# Altium PCB Bemine-mc60_PCB.PcbDoc
Units mm, origin at the board's own origin, x right, y up, seen from the top; angles counter-clockwise.
Board outline 74.65 x 35.15 mm, 2 copper layers (Top Layer, Bottom Layer); 88 components, 55 nets, 297 pads, 32 vias.
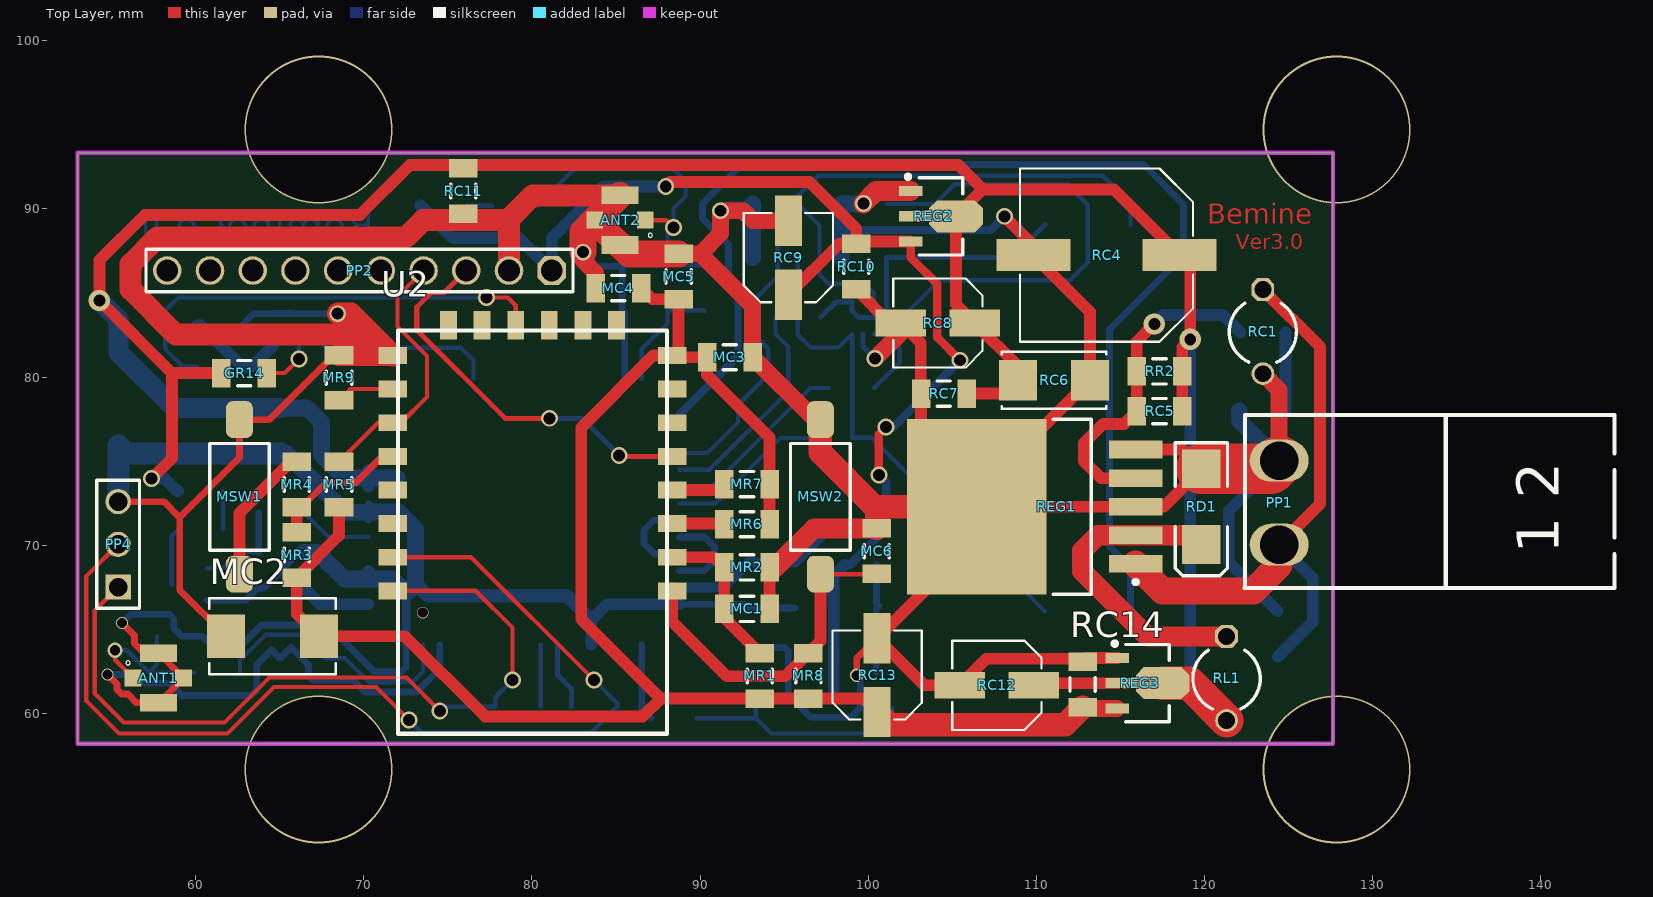
[diagram p0: Top Layer view]
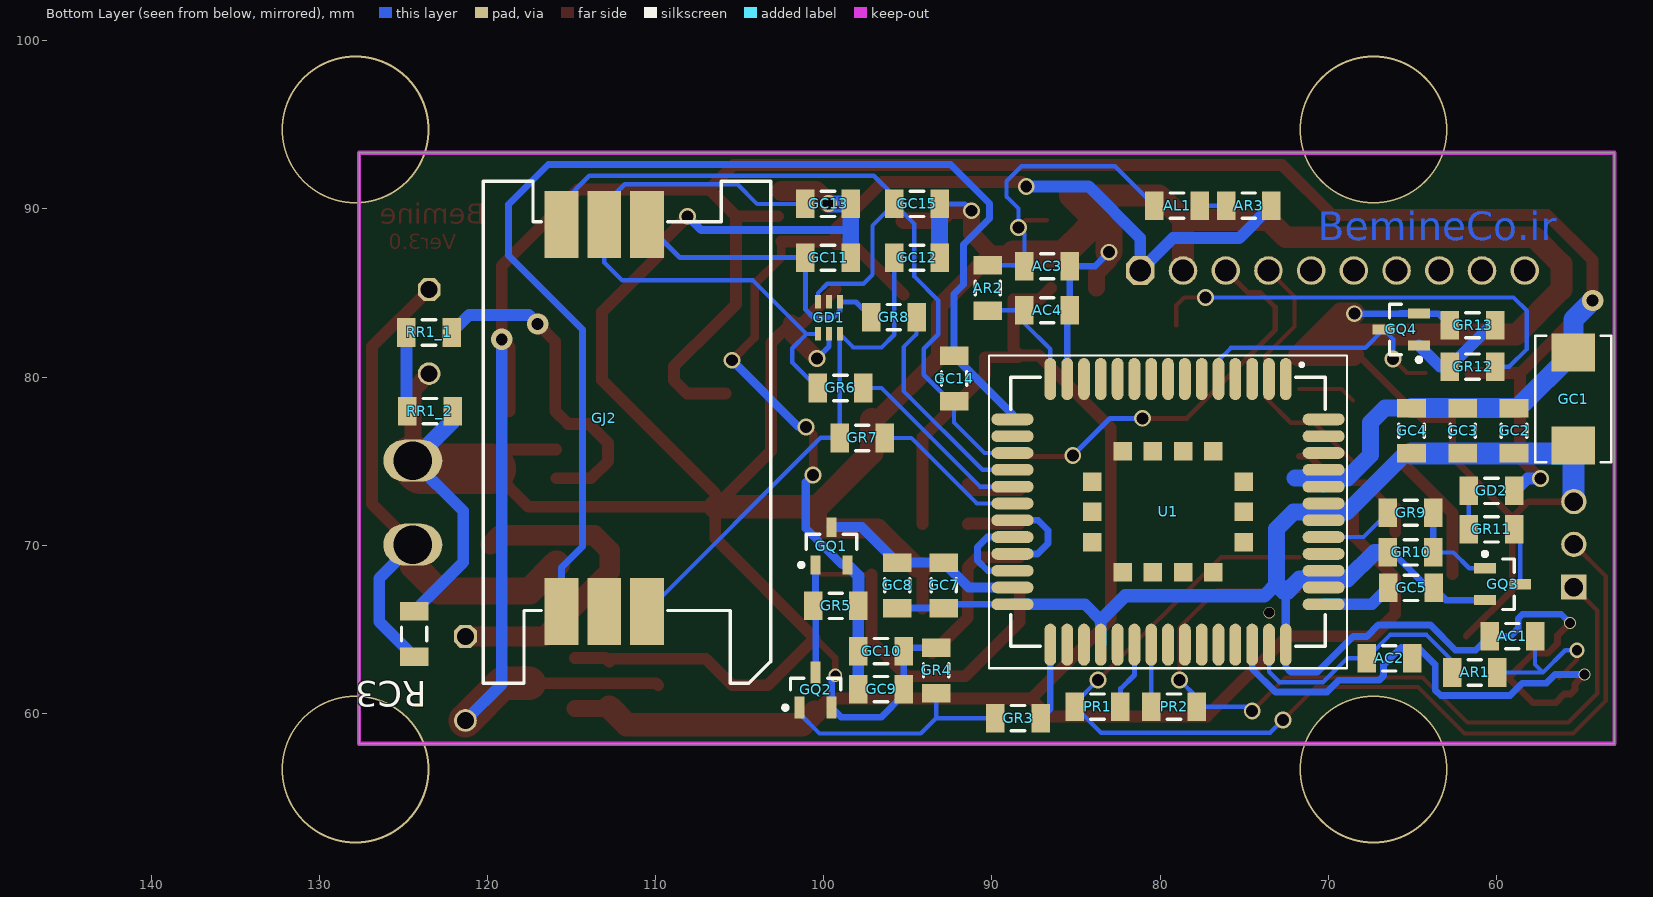
[diagram p1: Bottom Layer view, seen from below]

## Layer stack, top to bottom
Top Solder: solder mask 0.0102, Solder Resist, Dk 3.5
Top Layer: signal copper 0.0356
Dielectric 1: dielectric 0.32, FR-4, Dk 4.8
Bottom Layer: signal copper 0.0356
Bottom Solder: solder mask 0.0102, Solder Resist, Dk 3.5

## Board outline
52.984,58.191 52.984,93.345 127.635,93.345 127.635,58.191

## Design rules (kind name [scope] priority, off if disabled: settings)
Clearance [All] p1: gap=0.254 ignorepadtopadclearanceinfootprint=FALSE except(0: Arc-Hole Track-Hole SMDPad-Hole THPad-Hole Via-Hole Fill-Hole Poly-Hole Region-Hole Text-Hole)
PolygonConnect [All] p1: connectstyle=Relief reliefconductorwidth=0.254 reliefentries=4 polygonreliefangle="90 Angle" airgapwidth=0.254
RoutingTopology [InNet('GND')] p1: topology=Daisy_Balanced
RoutingVias [All] p1: holewidth=0.711 width=1.27 viastyle="Through Hole" minholewidth=0.711 minwidth=1.27 maxholewidth=0.711 maxwidth=1.27
SolderMaskExpansion [All] p1: expansion=0.102
Width [All] p1: maxlimit=4 minlimit=0.254 preferedwidth=0.7
29 further rules are at their usual default settings.

## Components (designator, comment, footprint, x,y, rotation, side; value= is the part's Value field where it differs from the comment)
AC1 "NM" C1206 59.055,64.592 r0 bottom
AC2 "NM" C1206 66.37,63.271 r180 bottom
AC3 "NM" C1206 86.716,86.589 r180 bottom
AC4 "NM" C1206 86.716,83.972 r180 bottom
AL1 "47nH" C1206 78.994,90.195 r180 bottom value=10mH
ANT1 "" MOLEX_73412-0110 57.785,62.103 r0 top
ANT2 "73412-0110" MOLEX_73412-0110 85.242,89.332 r180 top
AR1 "0" C1206 61.29,62.433 r180 bottom
AR2 "0" C1206 90.246,85.293 r90 bottom
AR3 "10" C1206 74.727,90.195 r0 bottom
GC1 "100uF; 16V" CAPCP7343X430N 55.423,78.689 r270 bottom
GC2 "100nF" C1206 58.953,76.81 r270 bottom
GC3 "33pF" C1206 62.001,76.81 r270 bottom
GC4 "10pF" C1206 65.049,76.81 r270 bottom
GC5 "2.2uF" C1206 65.075,67.462 r180 bottom
GC7 "10uF" C1206 92.862,67.615 r270 bottom
GC8 "100nF" C1206 95.631,67.615 r270 bottom
GC9 "10uF" C1206 96.596,61.443 r180 bottom
GC10 "100nF" C1206 96.596,63.703 r180 bottom
GC11 "33pF" C1206 99.746,87.097 r0 bottom
GC12 "33pF" C1206 94.463,87.097 r0 bottom
GC13 "33pF" C1206 99.746,90.297 r0 bottom
GC14 "100nF" C1206 92.253,79.908 r90 bottom
GC15 "33pF" C1206 94.463,90.297 r180 bottom
GD1 "SMF05C.TCT" SC70-6 99.695,83.515 r180 bottom
GD2 "LED2" C1206 60.3,73.228 r0 bottom
GJ2 "SIM_HOLDER" SIMCARD_SIZE_C 111.441,77.929 r180 bottom
GQ1 "IRLML6402" Micro3_N 99.543,69.952 r90 bottom
GQ2 "PMBT3904" SOT23_N 100.482,61.392 r90 bottom
GQ3 "PMBT3904" SOT23_N 59.631,67.681 r180 bottom
GQ4 "PMBT3904" SOT23_N 65.659,82.829 r0 bottom
GR3 "4.7k" C1206 88.443,59.715 r180 bottom
GR4 "47k" C1206 93.32,62.56 r90 bottom
GR5 "10k" C1206 99.289,66.396 r0 bottom
GR6 "22" C1206 99.009,79.35 r180 bottom
GR7 "22" C1206 97.714,76.378 r180 bottom
GR8 "22" C1206 95.834,83.566 r180 bottom
GR9 "4.7k" C1206 65.1,71.933 r0 bottom
GR10 "47k" C1206 65.1,69.571 r180 bottom
GR11 "4.7k" C1206 60.3,70.942 r0 bottom
GR12 "4.7k" C1206 61.417,80.62 r180 bottom
GR13 "47k" C1206 61.417,83.083 r180 bottom
GR14 "4.7k" C1206 62.89,80.239 r0 top
MC1 "100nF" C1206 92.786,66.218 r0 top
MC2 "100uF; 16V" CAPCP7343X430N 64.567,64.592 r180 top
MC3 "100nF" C1206 91.77,81.178 r0 top
MC4 "10pF" C1206 85.141,85.293 r180 top
MC5 "33pF" C1206 88.722,85.979 r90 top
MC6 "100nF" C1206 100.508,69.647 r90 top
MR1 "33k" C1206 93.548,62.23 r270 top
MR2 "10k" C1206 92.786,68.682 r180 top
MR3 "10k" C1206 66.015,69.418 r270 top
MR4 "22" C1206 66.015,73.609 r270 top
MR5 "10k" C1206 68.529,73.609 r270 top
MR6 "10k" C1206 92.786,71.247 r0 top
MR7 "10k" C1206 92.786,73.635 r0 top
MR8 "10k" C1206 96.444,62.23 r270 top
MR9 "10k" C1206 68.529,79.959 r270 top
MSW1 "Switch PB" "TE FSMSMTR" 62.611,72.873 r180 top
MSW2 "Switch PB" "TE FSMSMTR" 97.155,72.873 r180 top
PP1 "12v_Power" "phoenix terminal R 2" 144.374,67.459 r90 top
PP2 "MPU9250" HDR1X10 81.178,86.335 r180 top
PP4 "ESP_SERIAL" HDR1X3 55.397,67.513 r90 top
PR1 "1k" C1206 83.718,60.401 r180 bottom
PR2 "1k" C1206 79.172,60.401 r0 bottom
RC1 "1000uF 16V" CAPR5-4X5 123.469,82.702 r270 top value=100pF
RC3 "100nF" C1206 124.358,64.719 r90 bottom
RC4 "470 μF; 25 V" "WCAP-PSLC 10x12.4x4.5" 114.173,87.249 r180 top
RC5 "15nF" C1206 117.323,77.978 r180 top
RC6 "10uF; 25V" CAPCP6032X280N 111.049,79.807 r0 top
RC7 "100nF" C1206 104.496,79.019 r180 top
RC8 "10 μF; 16V" "WCAP-PSLP 5x5.8x1.4" 104.14,83.21 r180 top
RC9 "4.7 μF; 16V" "WCAP-PSLP 5x5.8x1.4" 95.25,87.097 r90 top
RC10 "100nF" C1206 99.289,86.563 r270 top
RC11 "100nF" C1206 75.921,91.059 r270 top
RC12 "10 μF; 16V" "WCAP-PSLP 5x5.8x1.4" 107.645,61.671 r180 top
RC13 "4.7 μF; 16V" "WCAP-PSLP 5x5.8x1.4" 100.533,62.281 r90 top
RC14 "100nF" C1206 112.751,61.722 r90 top
RD1 "SM5822" SMB 119.812,72.288 r270 top
REG1 "LM2596S-ADJ" TS5B_N 109.906,72.288 r180 top
REG2 "AIC1734-33XA" SOT89N 104.318,89.56 r0 top
REG3 "AIC1734-33XA" SOT89N 116.611,61.798 r0 top
RL1 "68uH 3.1A" CAPR5-4X5 121.31,62.078 r270 top value=10mH
RR1_1 "1k; 1%" C1206 123.469,82.652 r180 bottom
RR1_2 "1k; 1%" C1206 123.419,77.978 r0 bottom
RR2 "4.7k; 1%" C1206 117.323,80.34 r180 top
U1 "MC60" XCVR_MC60 79.527,71.984 r270 bottom
U2 "ESP6288-12F" ESP8266-12F 88.036,82.765 r180 top

## Footprints (in the part's own frame and the unit in brackets; to place one, negate y for a bottom-side part, rotate by r counter-clockwise, add the part's x,y. Pads: shape width x height; smd on the part's side, far side on the other; paste and mask are expansions set on the pad)
C1206 [mm] "Chip Capacitor, Body 3.2x1.6mm, IPC High Density"
  rect 1.1x1.7 smd: 1(-1.35,0) 2(1.35,0)
  silkscreen extent -0.4,-0.75 0.4,0.75, body extent -1.7,-0.9 1.7,0.9, height 1.3
CAPCP6032X280N [mil]
  rect 89x95 smd: 1(-84,0) 2(84,0)
  silkscreen extent -122,-67 122,67
CAPCP7343X430N [mil]
  rect 89x102 smd: 1(-109,0) 2(109,0)
  silkscreen extent -148,-89 148,89
CAPR5-4X5 [mm] "Capacitor; 2 Leads"
  oct 1.35x1.35 hole 1: 1(-2.5,0)
  round 1.35 hole 1: 2(2.5,0)
  silkscreen extent -1.69,-2 1.82,2
ESP8266-12F [mm]
  rect 1.7x1 smd: 0(-0.305,15.48) 1(-0.305,13.48) 2(-0.305,11.48) 3(-0.305,9.48) 4(-0.305,7.48) 5(-0.305,5.48) 6(-0.305,3.48) 7(-0.305,1.48) 14(16.305,1.48) 15(16.305,3.48) 16(16.305,5.48) 17(16.305,7.48) 18(16.305,9.48) 19(16.305,11.48) 20(16.305,13.48) 21(16.305,15.48)
  rect 1x1.7 smd: 8(3,-0.305) 9(5,-0.305) 10(7,-0.305) 11(9,-0.305) 12(11,-0.305) 13(13,-0.305)
  silkscreen extent 0,0 16,23.98
HDR1X3 [mm] "Connector; Header; 3 Position"
  rect 1.5x1.5 hole 1.1: 1(0,0)
  round 1.5 hole 1.1: 2(2.54,0) 3(5.08,0)
  silkscreen extent -1.27,-1.27 6.35,1.27
HDR1X10 [mm] "Connector; Header; 10 Position"
  oct 1.7x1.7 hole 1.3: 1(0,0)
  round 1.7 hole 1.3: 2(2.54,0) 3(5.08,0) 4(7.62,0) 5(10.16,0) 6(12.7,0) 7(15.24,0) 8(17.78,0) 9(20.32,0) 10(22.86,0)
  silkscreen extent -1.27,-1.27 24.13,1.27
Micro3_N [mm] "SOT23, 3-Leads, Body 2.9x1.3mm, Pitch 0.95mm, Lead Span 2.3mm, IPC Medium Density"
  rect 1.15x0.6 smd: 1(-1.125,0.95) 2(-1.125,-0.95) 3(1.125,0)
  silkscreen extent -1.25,-1.5 0.7,1.93, body extent -0.7,-1.5 0.7,1.5, height 1.12
MOLEX_73412-0110 [mm]
  rect 1x1 smd: 1(-1.5,0) 3(1.5,0)
  rect 2.2x1.05 smd: 2(0,-1.475) 4(0,1.475)
  silkscreen extent -1.93,0.77 -1.67,1.03
"phoenix terminal R 2" [mm] "2 Right terminals"
  oval 2.5x3.5 hole 2.3: 1(2.573,19.939) 2(7.573,19.939)
  silkscreen extent 0,0 10.29,22
SC70-6 [mm]
  rect 0.35x0.8 smd: 1(-0.65,-0.95) 2(0,-0.95) 3(0.65,-0.95) 4(0.65,0.95) 5(0,0.95) 6(-0.65,0.95)
SIMCARD_SIZE_C [mm]
  rect 2x4 smd: C1(-4.154,11.136) C2(-1.614,11.136) C3(0.926,11.136) C5(-4.154,-11.864) C6(-1.614,-11.864) C7(0.926,-11.864)
  silkscreen extent -8.8,-16.13 8.3,13.72
SMB [mm] "DO-214-AA/SMB; 2 C-Bend Leads; Body 5.3 x 3.6 mm, inc. leads (LxW)"
  rect 2.3x2.3 smd: 1(-2.25,0) 2(2.25,0)
  silkscreen extent -3.8,-1.55 4.1,1.55
SOT23_N [mm] "SOT23, 3-Leads, Body 2.9x1.3mm, Pitch 0.95mm, Lead Span 2.3mm, IPC Medium Density"
  rect 1.3x0.6 smd: 1(-1.05,0.95) 2(-1.05,-0.95) 3(1.05,0)
  silkscreen extent -1.17,-1.5 0.7,1.93, body extent -0.7,-1.5 0.7,1.5, height 1.1
SOT89N [mm] "SOT89, 3-Leads, Body 4.5x2.4 mm, Pitch 1.5mm, Lead Span 4.1mm, IPC Medium Density"
  rect 1.4x0.6 smd: 1(-1.8,1.5) 3(-1.8,-1.5)
  rect 1.8x0.6 smd: 2(-1.6,0)
  oct 3.2x1.9 smd: 2(0.9,0)
  silkscreen extent -2.07,-2.3 1.3,2.47, body extent -1.3,-2.3 1.3,2.3, height 1.6
"TE FSMSMTR" [mm]
  rrect50% 1.6x2.19 smd: 1(0,4.595) 2(0,-4.595)
  silkscreen extent -1.78,-3.18 1.78,3.18, body extent -1.75,-4.98 1.75,4.98, height 4.42
TS5B_N [mm]
  rect 3.2x1.05 smd: 1(-6,3.4) 2(-6,1.7) 3(-6,0) 4(-6,-1.7) 5(-6,-3.4)
  rect 8.3x10.45 smd: 6(3.45,0)
  silkscreen extent -6.13,-5.2 -1.1,5.2, body extent -3.35,-5.2 6.05,5.2, height 4.65
"WCAP-PSLC 10x12.4x4.5" [mm] "Polarized capacitors, Aluminum Polymer Capacitors, 2-Leads, Body 10x12.4x4.5"
  rect 4.4x1.9 smd: 1(-4.35,0) 2(4.35,0)
  silkscreen extent -5.15,-5.15 5.15,5.15, body extent -5.5,-5.15 5.5,5.15, height 12.45
"WCAP-PSLP 5x5.8x1.4" [mm] "Polarized capacitors, Aluminum Polymer Capacitors, 2-Leads, Body 5x5.8x1.4"
  rect 3x1.6 smd: 1(-2.2,0) 2(2.2,0)
  silkscreen extent -2.65,-2.65 2.65,2.65, body extent -3,-2.65 3,2.65
XCVR_MC60 [mm]
  oval 2.5x0.7 smd: 1(-7.9,7) 2(-7.9,6) 3(-7.9,5) 4(-7.9,4) 5(-7.9,3) 6(-7.9,2) 7(-7.9,1) 8(-7.9,0) 9(-7.9,-1) 10(-7.9,-2) 11(-7.9,-3) 12(-7.9,-4) 13(-7.9,-5) 14(-7.9,-6) 15(-7.9,-7) 28(7.9,-7) 29(7.9,-6) 30(7.9,-5) 31(7.9,-4) 32(7.9,-3) 33(7.9,-2) 34(7.9,-1) 35(7.9,0) 36(7.9,1) 37(7.9,2) 38(7.9,3) 39(7.9,4) 40(7.9,5) 41(7.9,6) 42(7.9,7)
  oval 0.7x2.5 smd: 16(-5.5,-9.25) 17(-4.5,-9.25) 18(-3.5,-9.25) 19(-2.5,-9.25) 20(-1.5,-9.25) 21(-0.5,-9.25) 22(0.5,-9.25) 23(1.5,-9.25) 24(2.5,-9.25) 25(3.5,-9.25) 26(4.5,-9.25) 27(5.5,-9.25) 43(5.5,9.25) 44(4.5,9.25) 45(3.5,9.25) 46(2.5,9.25) 47(1.5,9.25) 48(0.5,9.25) 49(-0.5,9.25) 50(-1.5,9.25) 51(-2.5,9.25) 52(-3.5,9.25) 53(-4.5,9.25) 54(-5.5,9.25)
  rect 1.1x1.1 smd: 55(-3.6,2.7) 56(-3.6,0.9) 57(-3.6,-0.9) 58(-3.6,-2.7) 59(-1.8,-4.5) 60(0,-4.5) 61(1.8,-4.5) 62(3.6,-2.7) 63(3.6,-0.9) 64(3.6,0.9) 65(3.6,2.7) 66(1.8,4.5) 67(0,4.5) 68(-1.8,4.5)
  silkscreen extent -9.3,-10.65 9.3,10.65

## Part data
AC1 AC2 AC3 AC4 GC2 GC3 GC4 GC5 GC7 GC8 GC9 GC10 GC11 GC12 GC13 GC14 GC15 MC1 MC3 MC4 MC5 RC3 RC7 RC10 RC11 RC14: library part Cap-Bipolar, "Bipolar Capacitor", Voltage=100V, Adding Date=1387/12/20, Designer="Saeid Jorablo", Organazation=ControTec
AL1 RL1: library part Inductor, "Inductor", Code_IEC=1005, Code_JEITA=0402, LatestRevisionDate=29-May-2009, LatestRevisionNote="IPC-7351 Footprint Added.", PackageDescription="Chip Inductor", PackageReference=0402-A, Published=8-Jun-2000, Publisher="Altium Limited"
ANT1: library part 73412-0110, "50 Ohms, Microcoaxial RF, PCB Vertical Jack Receptacle, SMT, 1.25mm Mounted Height", Package=None, Availability=Good, MF=Molex, MP=73412-0110, Price="0.40 USD"
ANT2: "50 Ohms, Microcoaxial RF, PCB Vertical Jack Receptacle, SMT, 1.25mm Mounted Height", Package=None, Availability=Good, MF=Molex, MP=73412-0110, Price="0.40 USD"
AR1 AR2 AR3 GR3 GR4 GR5 GR6 GR7 GR8 GR9 GR10 GR11 GR12 GR13 GR14 MR3 MR4 MR5 MR6 MR7 MR8 MR9 PR1 PR2: library part Resistor, "Resistor"
GC1 MC2 RC5 RC6: library part Cap, "Capacitor", LatestRevisionDate=17-Jul-2002, LatestRevisionNote="Re-released for DXP Platform.", PackageDescription="Radial Cap, Thru-Hole; 2 Leads; 0.3 in Pin Spacing", PackageReference=RAD-0.3, Published=8-Jun-2000, Publisher="Altium Limited", STATE=NOT-AVAILABLE, TYPE=tantalum
GD1: Package="SOT-363 Diodes Inc.", Availability=Unavailable, MF=Semtech, MP=SMF05C.TCT, Price=None
GD2: "Typical RED, GREEN, YELLOW, AMBER GaAs LED", LatestRevisionDate=17-Jul-2002, LatestRevisionNote="Re-released for DXP Platform.", PackageDescription="SM LED; 2 Flat Leads", PackageReference=3.2X1.6X1.1, PackageVersion=Feb-2002, Published=8-Jun-2000, Publisher="Altium Limited"
GJ2: library part SIM5051-6-0-18-00-X_REVF, "Memory Socket, Sim Card, 6pos", Package=None, Availability=Unavailable, MF="Global Connector Technology", MP="SIM5051-6-0-18-00-A REV C", Price=None
GQ1: library part IRLML6401, "HEXFET Power MOSFET", ComponentLink1Description="Manufacturer Link", ComponentLink1URL=http://www.irf.com/, ComponentLink2Description=Datasheet, ComponentLink2URL=http://www.irf.com/product-info/datasheets/data/IRLML6401.pdf, DatasheetVersion=2-Jul-2001, PackageDescription="3-Pin SOT-23 Package 0.95 mm Pitch, 2.3 mm Lead Span", PackageReference=Micro3, PackageVersion=Jul-2001, Published=17-Sep-2003, Publisher="Altium Limited"
GQ2 GQ3 GQ4: "NPN Switching Transistor", ComponentLink1Description="Manufacturer Link", ComponentLink1URL=http://www.semiconductors.philips.com/, ComponentLink2Description=Datasheet, ComponentLink2URL=http://www.semiconductors.philips.com/acrobat/datasheets/PMBT3904_4.pdf, DatasheetVersion=27-Apr-1999, LatestRevisionDate=12-Dec-2006, LatestRevisionNote="IPC-7351 Footprint Added.", PackageDescription="3-Pin SOT-23 Package 0.95 mm Pitch, 2.3 mm Lead Span", PackageReference=SOT23, PackageVersion=May-1999, Published=17-Sep-2003, Publisher="Altium Limited"
MC6: library part SMT_C_0402, "Surface mount capacitor 0402"
MR1 MR2 RR1_1 RR1_2 RR2: library part Res1, "Resistor", LatestRevisionDate=17-Jul-2002, LatestRevisionNote="Re-released for DXP Platform.", PackageDescription="Axial Device, Thru-Hole; 2 Leads; 0.3 in Pin Spacing", PackageReference=AXIAL-0.3, Published=8-Jun-2000, Publisher="Altium Limited"
MSW1 MSW2: "Push Button Switch"
PP1: library part "Header 2", "Header, 2-Pin", LatestRevisionDate=17-Jul-2002, LatestRevisionNote="Re-released for DXP Platform.", Publisher="Altium Limited"
PP2: library part "Header 10", "Header, 10-Pin", LatestRevisionDate=17-Jul-2002, LatestRevisionNote="Re-released for DXP Platform.", Publisher="Altium Limited"
PP4: library part "Header 3", "Header, 3-Pin", LatestRevisionDate=17-Jul-2002, LatestRevisionNote="Re-released for DXP Platform.", Publisher="Altium Limited"
RC1: library part "Cap Pol1", "Polarized Capacitor (Radial)", LatestRevisionDate=17-Jul-2002, LatestRevisionNote="Re-released for DXP Platform.", PackageDescription="Polarized Capacitor (Radial); 2 Leads", PackageReference=RB7.6-15, Published=8-Jun-2000, Publisher="Altium Limited"
RC4: library part "WCAP-PSLC 10x12.4x4.5 875075361006", "WCAP-PSLC Aluminum Polymer Capacitors , 680 µF; + / - 20%; 16 V , 10 x 12,4", Capacitance="680 µF", Manufacturer="Wurth Elektronik", partNo=875075361006, Application="Low voltage port filtering, appplid to high-end switching power supply, PC(desktop,laptop ),industrial computer, VGA card, server power, charger, TV, digital set-top box,DC-DC power module, game machine etc which consume large current with high speed circuit.", Characteristics="Aluminum Polymer Capacitors; Recommended soldering: Reflow; Operating temperature: –55 °C to +105 °C; Large capacitance SMD product series; Very low ESR at high frequency range; High permissible ripple current; Long life and high reliability; Load life: 2000 h @ +105 °C", ComponentLink1Description=Manufacturer, ComponentLink1URL=http://www.we-online.com, ComponentLink2Description=Datasheet, ComponentLink2URL=http://katalog.we-online.de/pbs/datasheet/875075361006.pdf, Created by="Karrer Zheng", Created Date=6/8/2015, E-mail=libraries@we-online.com
RC8 RC12: library part "WCAP-PSLP 5x5.8x1.4 875105359001", "WCAP-PSLP Aluminum Polymer Capacitors , 10 µF; + / - 20%; 16 V , 5 x 5,8", Capacitance="10 µF", Manufacturer="Wurth Elektronik", partNo=875105359001, Application="Low voltage port filtering, appplid to high-end switching power supply, PC(desktop,laptop ),industrial computer, VGA card, server power, charger, TV, digital set-top box,DC-DC power module, game machine etc which consume large current with high speed circuit.", Characteristics="Aluminum Polymer Capacitors;Recommended soldering: Reflow;Operating temperature: –55 °C to +105 °C;Low profile SMD product series;Low ESR at high frequency range;High permissible ripple current;Load life: 2000 h @ +105 °C", ComponentLink1Description=Manufacturer, ComponentLink1URL=http://www.we-online.com, ComponentLink2Description=Datasheet, ComponentLink2URL=http://katalog.we-online.de/pbs/datasheet/875105359001.pdf, Created by="Karrer Zheng", Created Date=5/13/2015, E-mail=libraries@we-online.com
RC9 RC13: library part "WCAP-PSLP 5x5.8x1.4 875105359003", "WCAP-PSLP Aluminum Polymer Capacitors , 22 µF; + / - 20%; 16 V , 5 x 5,8", Capacitance="22 µF", Manufacturer="Wurth Elektronik", partNo=875105359003, Application="Low voltage port filtering, appplid to high-end switching power supply, PC(desktop,laptop ),industrial computer, VGA card, server power, charger, TV, digital set-top box,DC-DC power module, game machine etc which consume large current with high speed circuit.", Characteristics="Aluminum Polymer Capacitors;Recommended soldering: Reflow;Operating temperature: –55 °C to +105 °C;Low profile SMD product series;Low ESR at high frequency range;High permissible ripple current;Load life: 2000 h @ +105 °C", ComponentLink1Description=Manufacturer, ComponentLink1URL=http://www.we-online.com, ComponentLink2Description=Datasheet, ComponentLink2URL=http://katalog.we-online.de/pbs/datasheet/875105359003.pdf, Created by="Karrer Zheng", Created Date=5/13/2015, E-mail=libraries@we-online.com
RD1: library part "D Schottky", "Schottky Diode", Code_JEDEC=DO-214-AA, LatestRevisionDate=17-Jul-2002, LatestRevisionNote="Re-released for DXP Platform.", PackageDescription="DO-214-AA/SMB; 2 C-Bend Leads; Body 5.3 x 3.6 mm, inc. leads (LxW)", PackageReference=SMB, Published=8-Jun-2000, Publisher="Altium Limited"
REG1: "SIMPLE SWITCHER® Power Converter 150 KHz 3A Step-Down Voltage Regulator, 5-pin TO-263", Manufacturer="National Semiconductor", PackageTopMarking="NSUZXYTTE#*LM2596S*-ADJ P+", PowerWise=N, Supplier Part Number 1=1523864, Code_JEDEC=MO-169-AB, ComponentLink1Description="LM2596 Datasheet", ComponentLink1URL=http://www.national.com/ds/LM/LM2596.pdf, ComponentLink2Description="LM2596 Web Page", ComponentLink2URL=http://www.national.com/pf/LM/LM2596.html, ComponentLink3Description="TS5B Package Page", ComponentLink3URL=http://www.national.com/packaging/folders/ts5b.html, CompType=Switcher, DatasheetVersion=May-2002, PackageDescription="TO-263, Molded, .400 x .390 x .180in, 5 Lead, .067in Pitch, Surface Mount", PackageReference=TS5B, PackageVersion="revD, Apr-2005", PartNumber=LM2596S-ADJ, PinCount=5, Published=4-Dec-2008, Publisher="Altium Limited", RoHS=N, Supplier 1=Farnell, Supplier 2=Farnell, Supplier Part Number 2=9494367
REG2 REG3: library part HT7530-1, "3.0V 100mA Low Power,  Low Dropout Voltage (LDO) Regulator", Code_IPC=SOT89, ComponentLink1Description="Manufacturer Link", ComponentLink1URL=http://www.holtek.com/, ComponentLink2Description=Datasheet, ComponentLink2URL=http://www.holtek.com/pdf/consumer/75xx_1v150.pdf, DatasheetVersion="rev1.50, Jan-2006", PackageDescription="3-Pin SOT-89 Package 1.5 mm Pitch, 4.1 mm Lead Span", PackageReference=SOT-89, PackageVersion=Jan-2006, Published=30-Mar-2007, Publisher="Altium Limited"
U2: library part ESP8266-12F

## Free pads (board coordinates)
  round 0 on Mech16 paste+0 mask+0: 1(121.387,66.726) 1(124.435,70.032)

## Via types
v1: diameter 1, hole 0.711, Top Layer to Bottom Layer, 20 vias
v2: diameter 8.8, hole 8.6, Top Layer to Bottom Layer, 4 vias
v3: diameter 1.27, hole 0.711, Top Layer to Bottom Layer, 3 vias
v4: diameter 0.7, hole 0.6, Top Layer to Bottom Layer, 3 vias
v5: diameter 0.8, hole 0.6, Top Layer to Bottom Layer, 1 vias
v6: diameter 0.9, hole 0.6, Top Layer to Bottom Layer, 1 vias

## Nets (pads, with @x,y where several pads share a name; then routed paths per layer and width w, separated by ;. In a path a pad name is that pad's centre, name@x,y a point inside that pad or via, vN(x,y) a via of type N, cw(c..) or ccw(c..) an arc to the next point about the centre after c; other vN are vias at no path point)
GND: AC1.2 AC2.2 AC3.2 AC4.2 ANT1.2 ANT1.3 ANT1.4 ANT2.2 ANT2.3 ANT2.4 GC1.2 GC2.2 GC3.2 GC4.2 GC5.2 GC7.2 GC8.2 GC9.2 GC10.2 GC11.1 GC12.1 GC13.1 GC15.2 GD1.2 GQ2.2 GQ3.2 GQ4.2 GR4.2 GR10.1 GR13.1 MC1.2 MC2.2 MC3.2 MC4.2 MC5.2 MC6.2 MR2.1 MR9.1 MSW1.2 MSW2.2 PP1.2 PP2.2 PP4.3 RC1.2 RC3.2 RC4.2 RC6.2 RC7.2 RC8.2 RC9.2 RC10.2 RC11.2 RC12.2 RC13.2 RC14.2 RD1.1 REG1.3 REG1.5 REG1.6 REG2.1 REG3.1 RR1_2.1 U1.14 U1.27 U1.31 U1.40 U1.42 U1.44 U1.45 U1.48 U1.49 U2.14 | length 441
  Top Layer w0.4: v4(54.762,62.306) 55.331,61.738 55.331,61.415 55.597,61.149 55.97,61.149 56.491,60.628 ANT1.2 57.81,60.628 ANT1.3 57.81,63.578 ANT1.4 56.945,63.578 56.363,64.16 56.363,64.643 v4(55.626,65.38) ; PP4.3 58.115,72.593 59.055,71.653 ; MC2.2 59.055,67.335 59.055,71.653 ; MR9.1 68.228,81.309 64.387,77.468 MSW1.2 62.611,75.209 59.055,71.653 ; ANT2.2@85.217,90.807 ANT2.2 ; v5(99.314,62.255) 99.314,63.262 RC13.2
  Top Layer w0.7: MC1.2 MR2.1 ; RC10.2 101.291,83.21 RC8.2 103.12,82.03 103.12,78.994 RC7.2 103.146,75.599 REG1.6 ; v1(108.102,89.56) 109.823,87.84 RC4.2 113.182,83.89 RC6.2 106.456,73.08 REG1.6 ; REG3.1 112.977,63.298 RC14.2 112.577,63.246 107.02,63.246 RC12.2 103.343,61.671 RC13.2 106.456,70.403 REG1.6 ; REG1.5 118.662,75.688 RD1.1 117.562,72.288 REG1.3 REG1.6
  Top Layer w1: v1(83.033,87.427) 83.033,86.944 83.791,86.186 MC4.2 ; MC5.2 90.014,87.329 ; RC9.2 93.154,89.297 92.56,89.891 v1(91.211,89.891) 91.211,88.527 90.014,87.329 ; MSW2.2 96.831,77.468 MC3.2 93.12,84.223 90.014,87.329 ; v1(100.406,81.102) 101.94,82.636 RC8.2 ; RC1.2 124.435,79.237 PP1.2
  Top Layer w1.2: MR2.1 94.463,68.682 96.778,70.997 MC6.2 ; v1(99.72,90.322) 100.458,91.06 REG2.1
  Top Layer w1.3: v1(68.453,83.769) 69.247,83.769 70.492,82.525 ; MR9.1 U2.14@71.707,81.309 ; U2.14 U2.14@71.707,81.309 ; PP2.2 78.638,89.332 ; ANT2.2@85.217,90.807 80.063,90.807 78.638,89.383 78.638,89.332 ; 70.492,82.525 U2.14@71.707,81.309 ; 70.492,82.525 58.826,82.525 56.134,85.217 56.134,86.716 57.734,88.316 72.517,88.316 73.533,89.332 78.638,89.332
  Top Layer w1.4: MSW2.2 97.155,75.512 100.378,72.288 ; MC6.2 100.508,72.159 100.378,72.288 ; REG1.6 100.378,72.288
  Top Layer w1.6: v1(83.033,87.427) 83.033,88.622 ANT2.3 ; ANT2.2@85.217,90.807 ANT2.3 ; MC5.2 85.77,87.329 ANT2.4 85.217,87.857 ANT2.3
  Top Layer w3: RD1.1 123.941,74.538 PP1.2
  Bottom Layer w0.3: v1(91.211,89.891) 91.618,90.297 GC15.2 ; GD1.2 99.695,81.813 v1(100.406,81.102)
  Bottom Layer w0.4: v4(54.762,62.306) 56.515,62.306 57.023,61.798 58.445,61.798 59.182,61.062 63.311,61.062 63.644,61.395 63.644,62.908 64.514,63.777 AC2.2 65.67,63.921 66.716,62.875 66.716,62.233 66.982,61.967 68.458,61.967 68.467,61.976 69.359,61.976 70.067,61.268 73.139,61.268 74.527,62.657 U1.40 ; v4(55.626,65.38) 56.143,65.896 58.443,65.896 58.709,65.63 58.709,65.04 59.157,64.592 AC1.2 61.243,63.754 62.428,63.754 63.924,65.249 67.034,65.249 67.708,64.575 68.521,64.575 70.637,62.459 72.238,62.459 72.527,62.748 U1.42 ; GQ3.2 62.993,66.731 GC5.2 64.059,67.462 66.167,69.571 GR10.1 ; GR13.1 63.453,83.769 GQ4.2@64.609,83.769 ; GQ4.2 65.725,83.779 65.735,83.769 v1(68.453,83.769) ; U1.48 70.277,71.958 70.277,71.984 U1.49 ; v1(83.033,87.427) 83.871,86.589 AC3.2 AC4.2 85.527,83.811 U1.14 ; U1.27 92.644,66.484 GC7.2 GC8.2 ; GR4.2 95.039,63.91 GC10.2 GC9.2 95.246,61.116 96.596,59.766 98.957,59.766 GQ2.2 99.532,62.037 v5(99.314,62.255)
  Bottom Layer w0.5: U1.42 72.527,67.174 ; 98.396,88.748 107.29,88.748 v1(108.102,89.56)
  Bottom Layer w0.7: 70.277,67.984 U1.45 ; U1.31 83.527,65.545 84.466,66.484 U1.27 ; RC3.2 121.437,68.99 121.437,72.034 PP1.2
  Bottom Layer w0.8: 73.076,67.722 73.793,67.005 82.067,67.005 83.527,65.545
  Bottom Layer w1: GC4.2 65.409,75.46 68.91,71.958 70.277,71.958 71.044,71.958 ; GR10.1 67.259,69.571 68.846,67.984 70.277,67.984 71.717,67.984 72.527,67.174 73.076,67.722 73.076,70.968 72.06,71.984 70.277,71.984 ; GC12.1 GC15.2 ; GC11.1 98.396,88.748 GC13.1 99.695,90.297 v1(99.72,90.322) ; RR1_2.1 122.069,77.397 PP1.2
  Bottom Layer w1.3: PP4.3 55.423,72.619 GC1.2 55.884,75.46 GC2.2 GC3.2 GC4.2
NetAC1_1: AC1.1 ANT1.1 AR1.2 | length 9.7
  Top Layer w0.254: v6(55.22,63.754) 55.22,63.168 ANT1.1
  Bottom Layer w0.254: v6(55.22,63.754) 55.905,63.754 57.226,62.433 ; AC1.1 57.705,62.912 57.226,62.433 ; AR1.2 57.226,62.433
NetAC2_1: AC2.1 AR1.1 U1.41 | length 15.3
  Bottom Layer w0.254: AR1.1 62.64,63.144 64.164,64.668 66.323,64.668 AC2.1 68.885,63.271 70.307,61.849 72.898,61.849 73.527,62.478 U1.41
NetAC3_1: AC3.1 AL1.1 ANT2.1 AR2.2 | length 19.7
  Top Layer w0.254: ANT2.1 87.986,89.332 v1(88.417,88.9)
  Bottom Layer w0.254: AL1.1 82.681,92.532 88.24,92.532 89.129,91.643 89.129,90.729 88.417,90.018 v1(88.417,88.9) 88.066,88.548 AC3.1 88.12,86.643 AR2.2
NetAC4_1: AC4.1 AR2.1 U1.15 | length 6.9
  Bottom Layer w0.254: U1.15 86.527,81.651 88.066,83.189 AC4.1 90.217,83.972 AR2.1
NetAL1_2: AL1.2 AR3.2 | length 1.6
  Bottom Layer w0.254: AR3.2 AL1.2
NetGC11_2: GC11.2 GD1.4 GJ2.C3 GR8.1 | length 18.5
  Bottom Layer w0.3: GR8.1 98.083,84.465 GD1.4 99.045,83.937 99.441,83.541 100.609,83.541 101.096,84.027 GC11.2 108.547,87.097 GJ2.C3
NetGC12_2: GC12.2 GD1.3 GJ2.C7 GR7.1 | length 30.4
  Bottom Layer w0.254: GC12.2 95.813,82.521 96.571,81.763 98.242,81.763 GD1.3 99.045,76.397 100.184,76.397 GJ2.C7
NetGC13_2: GC13.2 GD1.1 GJ2.C2 GR6.1 | length 35
  Bottom Layer w0.254: GD1.1 101.031,82.565 ; GR6.1 101.879,80.87 101.879,81.717 101.031,82.565 ; GC13.2 103.962,90.297 105.131,91.465 111.836,91.465 113.055,90.246 GJ2.C2 113.055,86.817 111.989,85.75 104.216,85.75 101.031,82.565
NetGC14_1: GC14.1 GC15.1 GD1.6 GJ2.C1 U1.18 | length 51.2
  Bottom Layer w0.254: U1.18 90.444,75.484 92.253,77.292 GC14.1 92.478,78.558 94.056,80.137 94.056,81.686 93.193,82.55 93.193,84.557 94.615,85.979 94.615,89.099 GC15.1 ; GD1.6 100.345,84.999 99.797,85.547 97.638,85.547 97.104,86.081 97.104,89.005 GC15.1 ; GJ2.C1 115.595,90.322 113.944,91.973 97.028,91.973 95.813,90.758 GC15.1
NetGC14_2: GC14.2 GJ2.C5 U1.16 | length 72.2
  Bottom Layer w0.4: GC14.2 92.253,84.938 91.694,85.496 91.694,87.884 90.145,89.433 90.145,90.322 92.456,92.634 116.383,92.634 118.745,90.272 118.745,87.224 114.351,82.829 114.351,69.926 115.595,68.682 GJ2.C5
  Bottom Layer w0.5: U1.16 88.777,77.783 GC14.2
NetGD2_2: GD2.2 GR11.2 | length 2.3
  Bottom Layer w0.254: GR11.2 GD2.2
NetGQ1_1: GQ1.1 GQ2.3 GR5.2 | length 6.5
  Bottom Layer w0.4: GQ2.3 100.482,66.239 GR5.2 100.493,66.542 GQ1.1
NetGQ2_1: GQ2.1 GR3.1 GR4.1 | length 14.4
  Bottom Layer w0.254: GR3.1 93.32,59.715 ; GR4.1 93.32,59.715 ; GQ2.1 101.432,59.98 100.254,58.801 94.234,58.801 93.32,59.715
NetGQ3_1: GQ3.1 GR9.1 GR10.2 | length 5.8
  Bottom Layer w0.254: GQ3.1 61.62,68.631 62.56,69.571 GR10.2
  Bottom Layer w0.4: GR10.2 GR9.1
NetGQ3_3: GQ3.3 GR11.1 | length 3.4
  Bottom Layer w0.254: GQ3.3 58.581,70.573 GR11.1
NetGQ4_1: GQ4.1 GR12.1 GR13.2 | length 6.1
  Bottom Layer w0.7: GR13.2 60.303,83.083 GR12.1 63.349,80.62 GQ4.1
NetGQ4_3: GQ4.3 GR14.2 U1.5 | length 15.9
  Top Layer w0.254: GR14.2 65.303,80.239 v1(66.142,81.077)
  Bottom Layer w0.254: v1(66.142,81.077) 66.142,82.262 GQ4.3 67.801,81.737 75.794,81.737 76.527,81.003 U1.5
NetGR3_2: GR3.2 U1.28 | length 4.6
  Bottom Layer w0.4: U1.28 86.527,60.281 GR3.2
NetGR6_2: GR6.2 U1.20 | length 11.3
  Bottom Layer w0.254: U1.20 90.705,73.484 96.571,79.35 GR6.2
NetGR7_2: GR7.2 U1.21 | length 9.2
  Bottom Layer w0.254: U1.21 90.899,72.484 94.793,76.378 GR7.2
NetGR8_2: GR8.2 U1.19 | length 13.1
  Bottom Layer w0.254: U1.19 90.562,74.484 95.25,79.172 95.25,81.788 94.484,82.554 GR8.2
NetGR9_2: GR9.2 U1.47 | length 4.4
  Bottom Layer w0.254: GR9.2 67.899,70.484 U1.47
NetGR12_2: GR12.2 U2.11 | length 27.2
  Top Layer w0.254: v1(77.292,84.734) 78.562,84.734 79.036,84.26 U2.11
  Bottom Layer w0.254: GR12.2 59.233,80.62 58.191,81.661 58.191,83.947 58.979,84.734 v1(77.292,84.734)
NetMC1_1: MC1.1 MR1.1 MR2.2 U2.1 | length 9.3
  Top Layer w0.7: U2.1 90.833,69.285 MR2.2 MC1.1 91.436,65.692 MR1.1
NetMC6_1: MC6.1 MR8.1 MSW2.1 U2.0 | length 20.2
  Top Layer w0.254: MSW2.1 100.489,68.278 MC6.1
  Top Layer w0.7: U2.0 88.341,65.456 91.592,62.205 95.068,62.205 MR8.1 97.155,64.291 MSW2.1
NetMR3_1: MR3.1 MR4.2 U2.17 | length 8.5
  Top Layer w0.4: MR4.2 66.29,72.259 67.742,73.711 69.52,73.711 71.094,75.285 U2.17
  Top Layer w0.7: MR3.1 MR4.2
NetMR4_1: MR4.1 MSW1.1 | length 8.3
  Top Layer w0.7: MSW1.1 62.611,71.907 65.663,74.959 MR4.1
NetMR5_1: MR5.1 PP2.4 U2.16 | length 15.7
  Top Layer w0.254: MR5.1 70.855,77.285 U2.16 72.23,77.285 73.762,78.816 73.762,81.255 72.009,83.007 72.009,84.785 PP2.4
NetMR6_1: MR6.1 U2.2 | length 3.1
  Top Layer w0.7: U2.2 91.399,71.285 MR6.1
NetMR7_1: MR7.1 U2.3 | length 3.2
  Top Layer w0.7: U2.3 91.086,73.285 MR7.1
NetMR9_2: MR9.2 U2.15 | length 3.5
  Top Layer w0.254: MR9.2 69.205,79.285 U2.15
NetPP2_3: PP2.3 U2.4 | length 23.5
  Top Layer w0.3: PP2.3 74.803,85.039 74.041,85.039 73.152,84.15 73.152,82.804 78.41,77.546 v1(81.051,77.546) ; v1(85.192,75.336) 85.243,75.285 U2.4
  Bottom Layer w0.3: v1(81.051,77.546) 82.982,77.546 v1(85.192,75.336)
NetPP4_1: PP4.1 PR2.1 U2.21 | length 46.6
  Top Layer w0.254: PP4.1 54,66.116 54,61.189 55.728,59.461 61.722,59.461 64.389,62.128 72.542,62.128 v1(74.524,60.147) ; U2.21 76.657,67.285 78.842,65.1 v1(78.842,61.976)
  Bottom Layer w0.254: v1(74.524,60.147) 74.778,60.401 PR2.1 77.822,60.956 v1(78.842,61.976)
NetPP4_2: PP4.2 PR1.1 U2.20 | length 62.5
  Top Layer w0.254: PP4.2 53.492,68.148 53.492,60.757 55.448,58.801 61.9,58.801 64.668,61.57 70.739,61.57 v1(72.695,59.614) ; U2.20 76.384,69.285 v1(83.693,61.976)
  Bottom Layer w0.254: v1(72.695,59.614) 73.457,58.852 83.519,58.852 PR1.1 85.068,60.601 v1(83.693,61.976)
NetPR1_2: PR1.2 U1.33 | length 4
  Bottom Layer w0.3: U1.33 81.527,62.287 82.343,61.472 82.343,60.427 PR1.2
NetPR2_2: PR2.2 U1.34 | length 3.7
  Bottom Layer w0.254: PR2.2 80.527,60.407 U1.34
NetRC5_2: RC5.2 REG1.4 RR1_1.2 RR2.2 | length 19.9
  Top Layer w0.7: REG1.4 113.845,73.988 112.827,75.006 112.827,76.073 113.97,77.216 115.211,77.216 RC5.2 RR2.2 115.973,82.114 v3(117.018,83.16)
  Bottom Layer w0.7: v3(117.018,83.16) 117.551,83.693 121.078,83.693 RR1_1.2
NetRD1_2: RD1.2 REG1.2 RL1.1 | length 19.1
  Top Layer w1.2: RD1.2 119.262,70.588 REG1.2 113.641,70.588 112.725,69.672 112.725,68.453 116.601,64.578 RL1.1
NetRR1_1_1: RR1_1.1 RR1_2.2 | length 4.7
  Bottom Layer w0.7: RR1_2.2 124.819,78.028 RR1_1.1
NetU1_22: U1.22 U1.24 | length 5.5
  Bottom Layer w0.4: U1.24 87.285,69.484 86.665,70.104 86.665,70.891 87.257,71.484 U1.22
NetU1_23: U1.23 U1.25 | length 5.5
  Bottom Layer w0.4: U1.25 90.251,68.484 90.856,69.088 90.856,69.901 90.273,70.484 U1.23
NetU1_29: U1.29
NetU1_30: U1.30
NetU2_5: U2.5
NetU2_6: U2.6
NetU2_10: U2.10
NetU2_18: U2.18
NetU2_19: U2.19
V3.3: AR3.1 GC9.1 GC10.1 GQ1.2 GR5.1 PP2.1 RC9.1 RC10.1 REG2.3 | length 73.2
  Top Layer w0.5: v1(100.635,74.168) 100.635,76.606 v1(101.067,77.038) ; REG2.3 102.518,87.119 104.115,85.522 104.115,82.347 v1(105.461,81.001)
  Top Layer w0.7: v1(87.96,91.338) 88.214,91.592 96.52,91.592 99.289,88.824 RC10.1 ; RC9.1 98.267,87.913 RC10.1 ; REG2.3 99.436,88.06 RC10.1
  Bottom Layer w0.3: GQ1.2 98.9,68.827
  Bottom Layer w0.5: 98.9,68.827 101.067,70.993 101.067,73.736 v1(100.635,74.168) ; v1(101.067,77.038) 101.498,77.038 v1(105.461,81.001)
  Bottom Layer w0.7: AR3.1 75.307,88.265 79.248,88.265 PP2.1 81.178,88.265 84.252,91.338 v1(87.96,91.338) ; GC9.1 GC10.1 97.946,66.388 GR5.1 97.939,68.173 GQ1.2
V12: PP1.1 RC1.1 RC3.1 REG1.1 | length 37
  Top Layer w0.7: RC1.1 126.873,81.799 126.873,72.47 PP1.1
  Top Layer w1.6: REG1.1 117.51,67.285 122.911,67.285 124.435,68.809 PP1.1
  Bottom Layer w0.7: RC3.1 126.441,65.452 126.441,68.025 PP1.1
V_ESP: MC2.1 MC3.1 MC4.1 MC5.1 MR1.2 MR3.2 MR5.2 MR6.2 MR7.2 MR8.2 RC13.1 RC14.1 REG3.3 U2.7 | length 105.1
  Top Layer w0.7: MR5.2 68.529,70.583 MR3.2 66.015,65.913 MC2.1 72.441,64.592 77.216,59.817 86.596,59.817 87.659,60.88 ; MC4.1 87.155,84.629 MC5.1 88.722,81.666 U2.7 ; MR6.2 MR7.2 94.136,76.399 90.42,80.115 MC3.1 88.447,81.178 U2.7 ; RC13.1 99.734,60.88 MR8.2 MR1.2 87.659,60.88 ; RC14.1 RC14.1@112.824,60.298 ; 87.659,60.88 82.931,65.608 82.931,76.987 87.228,81.285 U2.7
  Top Layer w1: RC14.1@112.824,60.298 REG3.3
  Top Layer w1.4: RC13.1 101.28,59.334 111.713,59.334 RC14.1
V_EXT: GC5.1 U1.43 | length 4.3
  Bottom Layer w0.7: GC5.1 67.404,66.484 U1.43
V_GNSS: GC7.1 GC8.1 GQ1.3 U1.26 | length 12.3
  Bottom Layer w0.6: U1.26 91.381,67.484 GC7.1 GC8.1 97.743,71.077 GQ1.3
VBAT: GC1.1 GC2.1 GC3.1 GC4.1 GD2.1 GR14.1 RC4.1 RC5.1 RC6.1 RC7.1 RC8.1 RC11.1 RC12.1 REG2.2 REG3.2 RL1.2 RR2.1 U1.50 U1.51 | length 179.5
  Top Layer w0.7: v1(57.379,73.965) 58.598,75.184 58.598,80.239 ; GR14.1 58.598,80.239 ; REG2.2@102.718,89.56 REG2.2@105.218,89.56 ; RC7.1 108.128,79.019 RC6.1 108.915,80.635 RC8.1 105.218,84.333 REG2.2@105.218,89.56 ; RC12.1 109.972,61.798 115.011,61.798 REG3.2@117.511,61.798 ; RC5.1 RR2.1 118.673,81.766 v3(119.151,82.245) 119.151,86.621 RC4.1 114.611,91.161 106.818,91.161 ; 58.598,80.239 v3(54.28,84.557) 54.28,86.944 56.972,89.637 69.774,89.637 72.746,92.608 105.37,92.608 106.818,91.161 ; REG2.2@105.218,89.56 106.818,91.161
  Top Layer w2: REG3.2@117.511,61.798 119.09,61.798 RL1.2
  Bottom Layer w0.7: v1(57.379,73.965) 58.162,73.965 58.924,73.203 GD2.1 ; U1.50 70.277,73.99 U1.51 ; v3(119.151,82.245) 119.151,61.737 RL1.2
  Bottom Layer w1: GC4.1 66.62,78.16 67.488,77.292 67.488,75.362 68.859,73.99 70.277,73.99 71.984,73.99
  Bottom Layer w1.2: v3(54.28,84.557) 55.423,83.414 GC1.1 58.721,78.16 GC2.1 GC3.1 GC4.1
pads on no net: GD1.5 GJ2.C6 PP2.5 PP2.6 PP2.7 PP2.8 PP2.9 PP2.10 U1.1 U1.2 U1.3 U1.4 U1.6 U1.7 U1.8 U1.9 U1.10 U1.11 U1.12 U1.13 U1.17 U1.32 U1.35 U1.36 U1.37 U1.38 U1.39 U1.46 U1.52 U1.53 U1.54 U1.55 U1.56 U1.57 U1.58 U1.59 U1.60 U1.61 U1.62 U1.63 U1.64 U1.65 U1.66 U1.67 U1.68 U2.8 U2.9 U2.12 U2.13
copper on no net:
  other v2: 67.31,56.677 127.86,56.677 67.31,94.717 127.86,94.717
  other v4: 73.508,65.989

## Keep-outs
Keep-Out Layer:
  the board outline again, w0.254

## Other copper
Top Layer:
  text "Bemine" at 120.167,89.129 h1.2
  text "Ver3.0" at 121.869,87.605 h0.9
Bottom Layer:
  text "BemineCo.ir" at 70.612,88.138 h1.7

## Text inside footprints (layer, text, board x,y; h text height)
PP1: Top Overlay "1 2" at 141.072,69.491 h2.5 r90